# EAGLE board V13 (EAGLE 7.1.0)
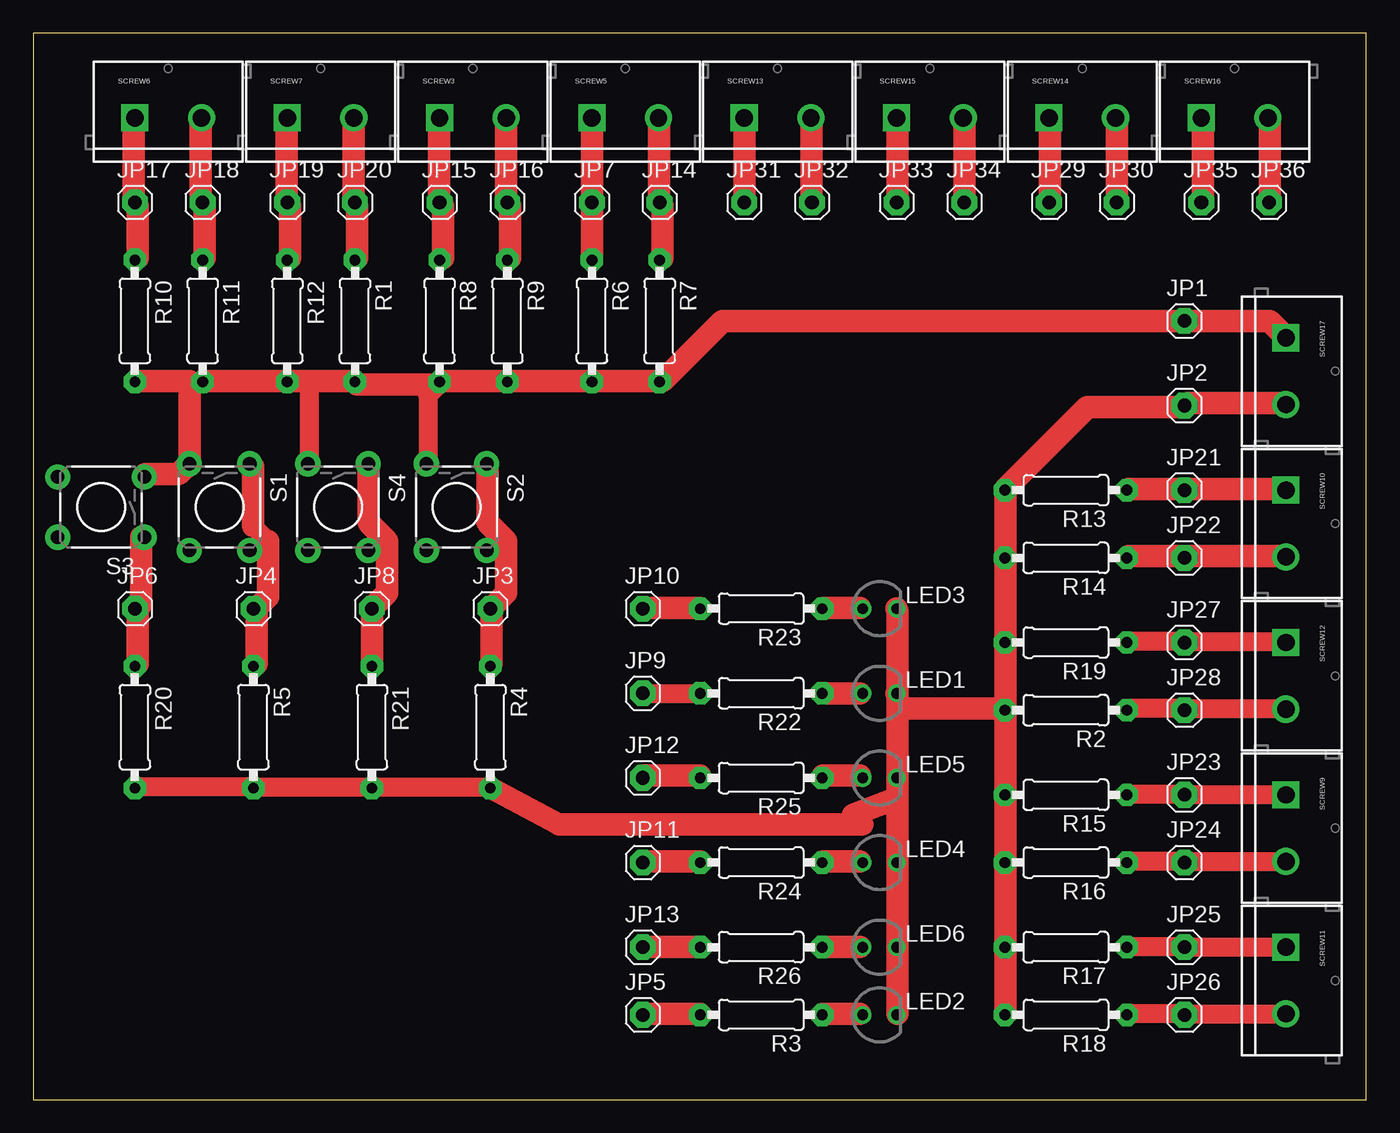
[diagram p0: board, top side]

Size 100 x 80 mm. Coordinates in mm from the lower left corner, seen from the top.
Outline: 0,0 100,0 100,80 0,80 0,0
Copper layers (1*16): Top 0.035mm / dielectric 1.5mm / Bottom 0.035mm
Design rules "default": minimum track width 10mil, minimum drill 24mil, track to track 8mil, track to pad 8mil, pad to pad 8mil, via to via 8mil, smd to smd 8mil, copper to edge 40mil, drill to drill 8mil, minimum pad ring 10mil, minimum via ring 8mil, stop-mask expansion 4mil, vias tented up to drill 0mil, thermal gap 10mil
Net classes: 0 default: width 0.254 mm, drill 0.508 mm, clearance 0.305 mm

## Footprints (pad centres in the part's own frame; a part is rotated, then mirrored left to right if it is on the bottom)
1X01 = drill 1.016 pad 1.93 octagon: 1 0,0
LED3MM-NS = drill 0.813: A -1.27,0; K 1.27,0
0207/9 = drill 0.813 pad 1.676 octagon: 1 -4.572,0; 2 4.572,0
TACTILE-PTH = drill 1.016 pad 1.88: 1 -3.251,2.261; 2 3.251,2.261; 3 -3.251,-2.261; 4 3.251,-2.261
SCREWTERMINAL-5MM-2 = drill 1.3 pad 2.032 square: 1 0,0 | drill 1.3 pad 2.032: 2 5,0

## Placement (x,y rotation side)
JP1  [1X01]  86.36,58.42 0 top
JP2  [1X01]  86.36,52.07 0 top
JP3  [1X01]  34.29,36.83 0 top
JP4  [1X01]  16.51,36.83 0 top
JP5  [1X01]  45.72,6.35 0 top
JP6  [1X01]  7.62,36.83 0 top
JP7  [1X01]  41.91,67.31 0 top
JP8  [1X01]  25.4,36.83 0 top
JP9  [1X01]  45.72,30.48 0 top
JP10  [1X01]  45.72,36.83 0 top
JP11  [1X01]  45.72,17.78 0 top
JP12  [1X01]  45.72,24.13 0 top
JP13  [1X01]  45.72,11.43 0 top
JP14  [1X01]  46.99,67.31 0 top
JP15  [1X01]  30.48,67.31 0 top
JP16  [1X01]  35.56,67.31 0 top
JP17  [1X01]  7.62,67.31 0 top
JP18  [1X01]  12.7,67.31 0 top
JP19  [1X01]  19.05,67.31 0 top
JP20  [1X01]  24.13,67.31 0 top
JP21  [1X01]  86.36,45.72 0 top
JP22  [1X01]  86.36,40.64 0 top
JP23  [1X01]  86.36,22.86 0 top
JP24  [1X01]  86.36,17.78 0 top
JP25  [1X01]  86.36,11.43 0 top
JP26  [1X01]  86.36,6.35 0 top
JP27  [1X01]  86.36,34.29 0 top
JP28  [1X01]  86.36,29.21 0 top
JP29  [1X01]  76.2,67.31 0 top
JP30  [1X01]  81.28,67.31 0 top
JP31  [1X01]  53.34,67.31 0 top
JP32  [1X01]  58.42,67.31 0 top
JP33  [1X01]  64.77,67.31 0 top
JP34  [1X01]  69.85,67.31 0 top
JP35  [1X01]  87.63,67.31 0 top
JP36  [1X01]  92.71,67.31 0 top
LED1  [LED3MM-NS]  63.5,30.48 0 top
LED2  [LED3MM-NS]  63.5,6.35 0 top
LED3  [LED3MM-NS]  63.5,36.83 0 top
LED4  [LED3MM-NS]  63.5,17.78 0 top
LED5  [LED3MM-NS]  63.5,24.13 0 top
LED6  [LED3MM-NS]  63.5,11.43 0 top
R1  [0207/9]  24.13,58.42 270 top
R2  [0207/9]  77.47,29.21 180 top
R3  [0207/9]  54.61,6.35 180 top
R4  [0207/9]  34.29,27.94 270 top
R5  [0207/9]  16.51,27.94 270 top
R6  [0207/9]  41.91,58.42 270 top
R7  [0207/9]  46.99,58.42 270 top
R8  [0207/9]  30.48,58.42 270 top
R9  [0207/9]  35.56,58.42 270 top
R10  [0207/9]  7.62,58.42 270 top
R11  [0207/9]  12.7,58.42 270 top
R12  [0207/9]  19.05,58.42 270 top
R13  [0207/9]  77.47,45.72 180 top
R14  [0207/9]  77.47,40.64 180 top
R15  [0207/9]  77.47,22.86 180 top
R16  [0207/9]  77.47,17.78 180 top
R17  [0207/9]  77.47,11.43 180 top
R18  [0207/9]  77.47,6.35 180 top
R19  [0207/9]  77.47,34.29 180 top
R20  [0207/9]  7.62,27.94 270 top
R21  [0207/9]  25.4,27.94 270 top
R22  [0207/9]  54.61,30.48 180 top
R23  [0207/9]  54.61,36.83 180 top
R24  [0207/9]  54.61,17.78 180 top
R25  [0207/9]  54.61,24.13 180 top
R26  [0207/9]  54.61,11.43 180 top
S1  SWITCH-MOMENTARY-2PTH  [TACTILE-PTH]  13.97,44.45 270 top
S2  SWITCH-MOMENTARY-2PTH  [TACTILE-PTH]  31.75,44.45 270 top
S3  SWITCH-MOMENTARY-2PTH  [TACTILE-PTH]  5.08,44.45 180 top
S4  SWITCH-MOMENTARY-2PTH  [TACTILE-PTH]  22.86,44.45 270 top
SCREW3  M025MM  [SCREWTERMINAL-5MM-2]  30.48,73.66 0 top
SCREW5  M025MM  [SCREWTERMINAL-5MM-2]  41.91,73.66 0 top
SCREW6  M025MM  [SCREWTERMINAL-5MM-2]  7.62,73.66 0 top
SCREW7  M025MM  [SCREWTERMINAL-5MM-2]  19.05,73.66 0 top
SCREW9  M025MM  [SCREWTERMINAL-5MM-2]  93.98,22.86 270 top
SCREW10  M025MM  [SCREWTERMINAL-5MM-2]  93.98,45.72 270 top
SCREW11  M025MM  [SCREWTERMINAL-5MM-2]  93.98,11.43 270 top
SCREW12  M025MM  [SCREWTERMINAL-5MM-2]  93.98,34.29 270 top
SCREW13  M025MM  [SCREWTERMINAL-5MM-2]  53.34,73.66 0 top
SCREW14  M025MM  [SCREWTERMINAL-5MM-2]  76.2,73.66 0 top
SCREW15  M025MM  [SCREWTERMINAL-5MM-2]  64.77,73.66 0 top
SCREW16  M025MM  [SCREWTERMINAL-5MM-2]  87.63,73.66 0 top
SCREW17  M025MM  [SCREWTERMINAL-5MM-2]  93.98,57.15 270 top

## Library data of the parts
JP1-JP36 R1-R26 = adafruit
LED1-LED6 = SparkFun-LED
S1-S4 = SparkFun-Electromechanical
SCREW3 SCREW5-SCREW7 SCREW9-SCREW17 = SparkFun-Connectors; STOREFRONT_ID: PRT-08432

## Nets
GND: JP2.1 LED1.K LED2.K LED3.K LED4.K LED5.K LED6.K R2.2 R4.2 R5.2 R13.2 R14.2 R15.2 R16.2 R17.2 R18.2 R19.2 R20.2 R21.2 SCREW17.2
N$1: JP3.1 R4.1 S2.1
N$2: JP29.1 SCREW14.1
N$3: JP20.1 R1.1 SCREW7.2
N$4: LED2.A R3.1
N$5: JP5.1 R3.2
N$6: JP4.1 R5.1 S1.1
N$7: JP17.1 R10.1 SCREW6.1
N$8: JP18.1 R11.1 SCREW6.2
N$9: JP19.1 R12.1 SCREW7.1
N$10: JP7.1 R6.1 SCREW5.1
N$11: JP14.1 R7.1 SCREW5.2
N$12: JP15.1 R8.1 SCREW3.1
N$13: JP16.1 R9.1 SCREW3.2
N$14: JP21.1 R13.1 SCREW10.1
N$15: JP22.1 R14.1 SCREW10.2
N$16: JP23.1 R15.1 SCREW9.1
N$17: JP24.1 R16.1 SCREW9.2
N$18: JP25.1 R17.1 SCREW11.1
N$19: JP6.1 R20.1 S3.1
N$20: JP27.1 R19.1 SCREW12.1
N$21: JP34.1 SCREW15.2
N$22: JP35.1 SCREW16.1
N$23: JP36.1 SCREW16.2
N$24: JP26.1 R18.1 SCREW11.2
N$25: JP28.1 R2.1 SCREW12.2
N$26: JP8.1 R21.1 S4.1
N$27: LED1.A R22.1
N$28: JP9.1 R22.2
N$29: JP30.1 SCREW14.2
N$30: JP31.1 SCREW13.1
N$31: JP32.1 SCREW13.2
N$32: JP33.1 SCREW15.1
N$33: LED3.A R23.1
N$34: JP10.1 R23.2
N$35: LED4.A R24.1
N$36: JP11.1 R24.2
N$37: LED5.A R25.1
N$38: JP12.1 R25.2
N$39: LED6.A R26.1
N$40: JP13.1 R26.2
VCC: JP1.1 R1.2 R6.2 R7.2 R8.2 R9.2 R10.2 R11.2 R12.2 S1.3 S2.3 S3.3 S4.3 SCREW17.1

## Tracks (layer width: path | path; a pad name or v marks a point on that pad's centre or on a via)
GND
  Top 0.254: 86.61,52.25 JP2.1 86.33,51.97 | 93.88,52.25 SCREW17.2 | 72.92,40.79 R14.2 72.92,40.51 | 72.92,45.54 R13.2 72.92,45.82 | 72.92,29.34 R2.2 | 72.92,34.09 R19.2 72.92,34.37 | 72.92,11.18 R17.2 72.92,11.46 | 72.92,17.88 R16.2 72.92,17.6 | 72.92,22.63 R15.2 72.92,22.91 | 72.92,29.06 R2.2 | 7.82,23.47 R20.2 | 16.48,23.47 R5.2 16.76,23.47 | 34.09,23.47 R4.2 | 25.43,23.47 R21.2 | 64.82,6.43 LED2.K | 64.82,11.18 LED6.K 64.82,11.46 | 64.82,17.88 LED4.K 64.82,17.6 | 64.82,24.03 LED5.K 64.82,24.31 | 64.82,30.45 LED1.K | 61.49,21.36 62.2,20.65 | 72.64,29.34 R2.2
  Top 1.422: 16.48,23.47 7.82,23.47 | 16.76,23.47 25.15,23.47 R21.2 | 25.43,23.47 34.09,23.47
  Top 1.676: 93.88,52.25 86.61,52.25 | 72.92,45.54 72.92,40.79 | 72.92,34.09 72.92,29.34 | 72.92,11.18 72.92,6.43 R18.2 | 72.92,22.63 72.92,17.88 | 72.92,17.6 72.92,11.46 | 72.92,22.91 72.92,29.06 | 72.92,34.37 72.92,40.51 | 86.33,51.97 79.07,51.97 72.92,45.82 | LED1.K 64.82,30.73 64.82,36.6 LED3.K | 64.82,11.18 64.82,6.43 | 64.82,24.03 64.82,22.63 | 64.82,22.63 64.82,17.88 | 64.82,17.6 64.82,11.46 | 64.82,24.31 64.82,29.34 | 64.82,29.34 64.82,30.45 | 62.2,20.65 39.45,20.65 R4.2 | 64.82,22.63 61.49,21.36 | 64.82,29.34 72.64,29.34
N$1
  Top 0.254: 34.09,47.5 S2.1 | 34.37,36.88 JP3.1
  Top 1.422: 34.37,32.69 R4.1
  Top 1.676: 34.37,32.69 34.37,36.6 JP3.1 | 34.09,47.5 34.09,43.31 35.48,41.91 35.48,38 34.37,36.88
N$2
  Top 0.254: 76.28,67.33 JP29.1 | 76.28,73.48 SCREW14.1
  Top 1.676: 76.28,73.48 76.28,67.33
N$3
  Top 0.254: 24.31,63.14 R1.1 | 24.31,67.06 JP20.1 24.03,67.33 | 24.03,73.48 SCREW7.2
  Top 1.676: 24.31,67.06 24.31,63.14 | 24.03,67.33 24.03,73.48
N$4
  Top 0.254: 62.03,6.43 LED2.A | 59.23,6.43 R3.1
  Top 1.676: 59.23,6.43 62.03,6.43
N$5
  Top 0.254: 50.01,6.43 R3.2 | 45.82,6.43 JP5.1
  Top 1.676: 45.82,6.43 50.01,6.43
N$6
  Top 0.254: 16.76,36.6 JP4.1 16.76,36.88
  Top 1.422: 17.6,41.91 16.48,43.03 | 16.48,47.5 S1.1
  Top 1.676: 16.76,36.6 16.76,32.69 R5.1 | 16.48,43.03 16.48,47.5 | 17.6,41.91 17.6,37.72 16.76,36.88
N$7
  Top 0.254: 7.82,63.14 R10.1 | 7.82,67.06 JP17.1 7.54,67.33 | 7.54,73.48 SCREW6.1
  Top 1.676: 7.82,67.06 7.82,63.14 | 7.54,67.33 7.54,73.48
N$8
  Top 0.254: 12.85,63.14 R11.1 | 12.85,67.06 JP18.1 12.57,67.33 | 12.57,73.48 SCREW6.2
  Top 1.676: 12.85,67.06 12.85,63.14 | 12.57,67.33 12.57,73.48
N$9
  Top 0.254: 19.28,67.06 JP19.1 19,67.33 | 19,73.48 SCREW7.1
  Top 1.676: 19.28,67.06 19.28,63.14 R12.1 | 19,67.33 19,73.48
N$10
  Top 1.676: R6.1 JP7.1 SCREW5.1
N$11
  Top 0.254: 47.22,63.14 R7.1 | 47.22,67.06 JP14.1 46.94,67.33 | 46.94,73.48 SCREW5.2
  Top 1.676: 47.22,67.06 47.22,63.14 | 46.94,67.33 46.94,73.48
N$12
  Top 0.254: 30.73,63.14 R8.1 | 30.73,67.06 JP15.1 30.45,67.33 | 30.45,73.48 SCREW3.1
  Top 1.676: 30.73,67.06 30.73,63.14 | 30.45,67.33 30.45,73.48
N$13
  Top 0.254: 35.76,63.14 R9.1 | 35.76,67.06 JP16.1 35.48,67.33 | 35.48,73.48 SCREW3.2
  Top 1.676: 35.76,67.06 35.76,63.14 | 35.48,67.33 35.48,73.48
N$14
  Top 0.254: 82.14,45.82 R13.1 | 86.33,45.82 JP21.1 86.61,45.82 | 93.88,45.82 SCREW10.1
  Top 1.676: 86.33,45.82 82.14,45.82 | 86.61,45.82 93.88,45.82
N$15
  Top 0.254: 82.14,40.79 R14.1 | 86.33,40.79 JP22.1 86.61,40.79 | 93.88,40.79 SCREW10.2
  Top 1.676: 86.33,40.79 82.14,40.79 | 86.61,40.79 93.88,40.79
N$16
  Top 0.254: 82.14,22.91 R15.1 | 86.33,22.91 JP23.1 86.61,22.91 | 93.88,22.91 SCREW9.1
  Top 1.422: 86.33,22.91 82.14,22.91 | 86.61,22.91 93.88,22.91
N$17
  Top 0.254: 82.14,17.88 R16.1 | 86.33,17.88 JP24.1 86.61,17.88 | 93.88,17.88 SCREW9.2
  Top 1.422: 86.33,17.88 82.14,17.88 | 86.61,17.88 93.88,17.88
N$18
  Top 0.254: 86.33,11.46 JP25.1 86.61,11.46 | 93.88,11.46 SCREW11.1
  Top 1.422: 86.33,11.46 82.14,11.46 R17.1 | 86.61,11.46 93.88,11.46
N$19
  Top 0.254: 8.1,37.16 7.82,36.88 JP6.1 | 8.1,42.19 S3.1
  Top 1.676: R20.1 7.82,32.69 7.82,36.6 JP6.1 | 8.1,37.16 8.1,42.19
N$20
  Top 0.254: 82.14,34.37 R19.1 | 86.33,34.37 JP27.1 86.61,34.37 | 93.88,34.37 SCREW12.1
  Top 1.422: 86.33,34.37 82.14,34.37 | 86.61,34.37 93.88,34.37
N$21
  Top 0.254: 69.85,73.48 SCREW15.2
  Top 1.676: 69.85,73.48 JP34.1
N$22
  Top 0.254: 87.73,67.33 JP35.1 | 87.73,73.48 SCREW16.1
  Top 1.676: 87.73,73.48 87.73,67.33
N$23
  Top 0.254: 92.76,67.33 JP36.1 | 92.76,73.48 SCREW16.2
  Top 1.676: 92.76,73.48 92.76,67.33
N$24
  Top 0.254: 82.14,6.43 R18.1 | 86.33,6.43 JP26.1 86.61,6.43 | 93.88,6.43 SCREW11.2
  Top 1.422: 86.33,6.43 82.14,6.43 | 86.61,6.43 93.88,6.43
N$25
  Top 0.254: 82.14,29.34 R2.1 | 86.33,29.34 JP28.1 86.61,29.34 | 93.88,29.34 SCREW12.2
  Top 1.422: 86.33,29.34 82.14,29.34 | 86.61,29.34 93.88,29.34
N$26
  Top 0.254: 25.43,32.69 R21.1 | 25.43,36.6 JP8.1 25.43,36.88 | 25.15,47.5 S4.1
  Top 1.676: 25.43,36.6 25.43,32.69 | 25.15,47.5 25.15,43.31 26.54,41.91 26.54,38 25.43,36.88
N$27
  Top 0.254: 62.03,30.45 LED1.A | 59.23,30.45 R22.1
  Top 1.676: 59.23,30.45 62.03,30.45
N$28
  Top 0.254: 50.01,30.45 R22.2
  Top 1.422: 50.01,30.45 45.82,30.45 JP9.1
N$29
  Top 0.254: 81.31,67.33 JP30.1 | 81.31,73.48 SCREW14.2
  Top 1.676: 81.31,73.48 81.31,67.33
N$30
  Top 0.254: 53.37,67.33 JP31.1 | 53.37,73.48 SCREW13.1
  Top 1.676: 53.37,73.48 53.37,67.33
N$31
  Top 0.254: 58.4,67.33 JP32.1 | 58.4,73.48 SCREW13.2
  Top 1.676: 58.4,73.48 58.4,67.33
N$32
  Top 0.254: 64.82,67.33 JP33.1 | 64.82,73.48 SCREW15.1
  Top 1.676: 64.82,73.48 64.82,67.33
N$33
  Top 0.254: 62.03,36.88 LED3.A | 59.23,36.88 R23.1
  Top 1.676: 59.23,36.88 62.03,36.88
N$34
  Top 1.422: 50.01,36.88 R23.2 | 45.82,36.88 JP10.1
  Top 1.676: 45.82,36.88 50.01,36.88
N$35
  Top 0.254: 62.03,17.88 LED4.A | 59.23,17.88 R24.1
  Top 1.676: 59.23,17.88 62.03,17.88
N$36
  Top 0.254: 50.01,17.88 R24.2 | 45.82,17.88 JP11.1
  Top 1.676: 45.82,17.88 50.01,17.88
N$37
  Top 0.254: 62.03,24.31 LED5.A | 59.23,24.31 R25.1
  Top 1.676: 59.23,24.31 62.03,24.31
N$38
  Top 0.254: 50.01,24.31 R25.2 | 45.82,24.31 JP12.1
  Top 1.676: 45.82,24.31 50.01,24.31
N$39
  Top 0.254: 62.03,11.46 LED6.A | 59.23,11.46 R26.1
  Top 1.676: 59.23,11.46 62.03,11.46
N$40
  Top 0.254: 50.01,11.46 R26.2 | 45.82,11.46 JP13.1
  Top 1.676: 45.82,11.46 50.01,11.46
VCC
  Top 0.254: 11.46,47.5 S1.3 11.73,47.78 | 11.73,53.92 12.57,53.92 R11.2 12.85,53.92 | 7.82,53.92 R10.2 | 19.28,53.92 R12.2 19,53.92 | 20.68,47.78 S4.3 | 86.61,58.4 JP1.1 86.33,58.4 | 46.94,53.92 R7.2 47.22,53.92 | 35.48,53.92 R9.2 | 29.62,47.78 S2.3 | 41.91,53.92 R6.2 | 24.31,53.65 R1.2
  Top 1.422: 20.68,53.92 20.68,47.78 | 30.73,53.92 R8.2 30.45,53.65 29.62,52.81 | 29.62,52.81 29.62,47.78 | 29.62,52.81 30.05,53.65
  Top 1.676: 11.46,47.5 10.9,46.94 8.38,46.94 S3.3 | 7.82,53.92 11.73,53.92 11.73,47.78 | 19.28,53.92 20.68,53.92 24.03,53.92 R1.2 | 19,53.92 12.85,53.92 | 86.61,58.4 92.76,58.4 93.88,57.28 SCREW17.1 | 46.94,53.92 41.91,53.92 35.76,53.92 R9.2 | 35.48,53.92 30.73,53.92 | 86.33,58.4 51.69,58.4 47.22,53.92 | 30.05,53.65 24.31,53.65